# EAGLE board C&K-7103_Breakout (EAGLE 9.6.2)
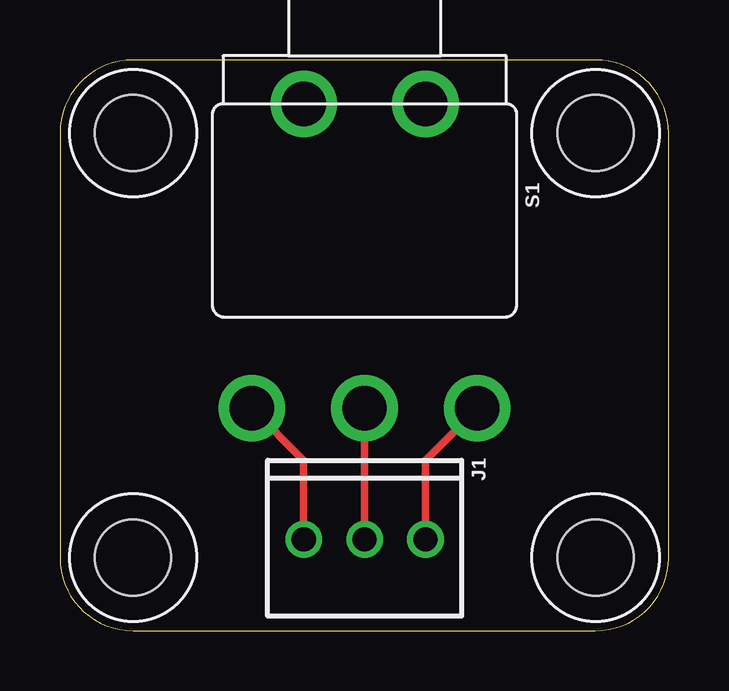
[diagram p0: board, top side]

Size 25.38 x 23.8 mm. Coordinates in mm from the lower left corner, seen from the top.
Outline: 22.33,23.8 3.05,23.8 arc90 0,20.75 0,3.05 arc90 3.05,0 22.33,0 arc90 25.38,3.05 25.38,20.75 arc90 22.33,23.8
Copper layers (1*16): Top 0.035559375mm / dielectric 1.6mm / Bottom 0.035559375mm
Design rules "oshpark-2layer": minimum track width 6mil, minimum drill 10mil, track to track 6mil, track to pad 6mil, pad to pad 6mil, via to via 6mil, smd to smd 6mil, copper to edge 15mil, drill to drill 6mil, minimum pad ring 5mil, minimum via ring 5mil, stop-mask expansion 2.5mil, vias tented up to drill 0mil, thermal gap 10mil

## Footprints (pad centres in the part's own frame; a part is rotated, then mirrored left to right if it is on the bottom)
4_40 = hole 3.175: 0,0
1X03_SCREW = drill 1.016: 1 -2.54,0; 2 0,0; 3 2.54,0
7103K2CWA = drill 1.85: 1 4.7,12.7; 2 0,12.7; 3 -4.7,12.7; BODY@1 -2.54,0; BODY@2 2.54,0

## Placement (x,y rotation side)
H1  [4_40]  3.05,20.75 0 top
H2  [4_40]  3.05,3.05 0 top
H3  [4_40]  22.33,3.05 0 top
H4  [4_40]  22.33,20.75 0 top
J1  CONN_32.54_SCREW  [1X03_SCREW]  12.7,3.81 180 top
S1  SPDT7103K2CWA  [7103K2CWA]  12.7,21.97 180 top

## Library data of the parts
H1-H4 = bschulz; DIGIKEY: DNP; MF: N/A; MPN: DNP
J1 = bschulz; DIGIKEY: ED10562-ND; MF: On Shore; MPN: OSTVN03A150
S1 = bschulz

## Nets
P1: J1.3 S1.1
P2: J1.1 S1.3
S: J1.2 S1.2

## Tracks (layer width: path | path; a pad name or v marks a point on that pad's centre or on a via)
P1
  Top 0.305: S1.1 10.16,7.11 J1.3
P2
  Top 0.305: J1.1 15.24,7.11 S1.3
S
  Top 0.305: S1.2 J1.2

## Text on the board
tDocu: Break44 / C&K-7103 Breakout / B. Schulz